# Altium PCB PCB1.PcbDoc
Units mil, origin at the board's own origin, x right, y up, seen from the top; angles counter-clockwise.
Board outline 3330 x 3590 mil, 2 copper layers (Top Layer, Bottom Layer); 11 components, 12 nets, 35 pads, 4 vias.
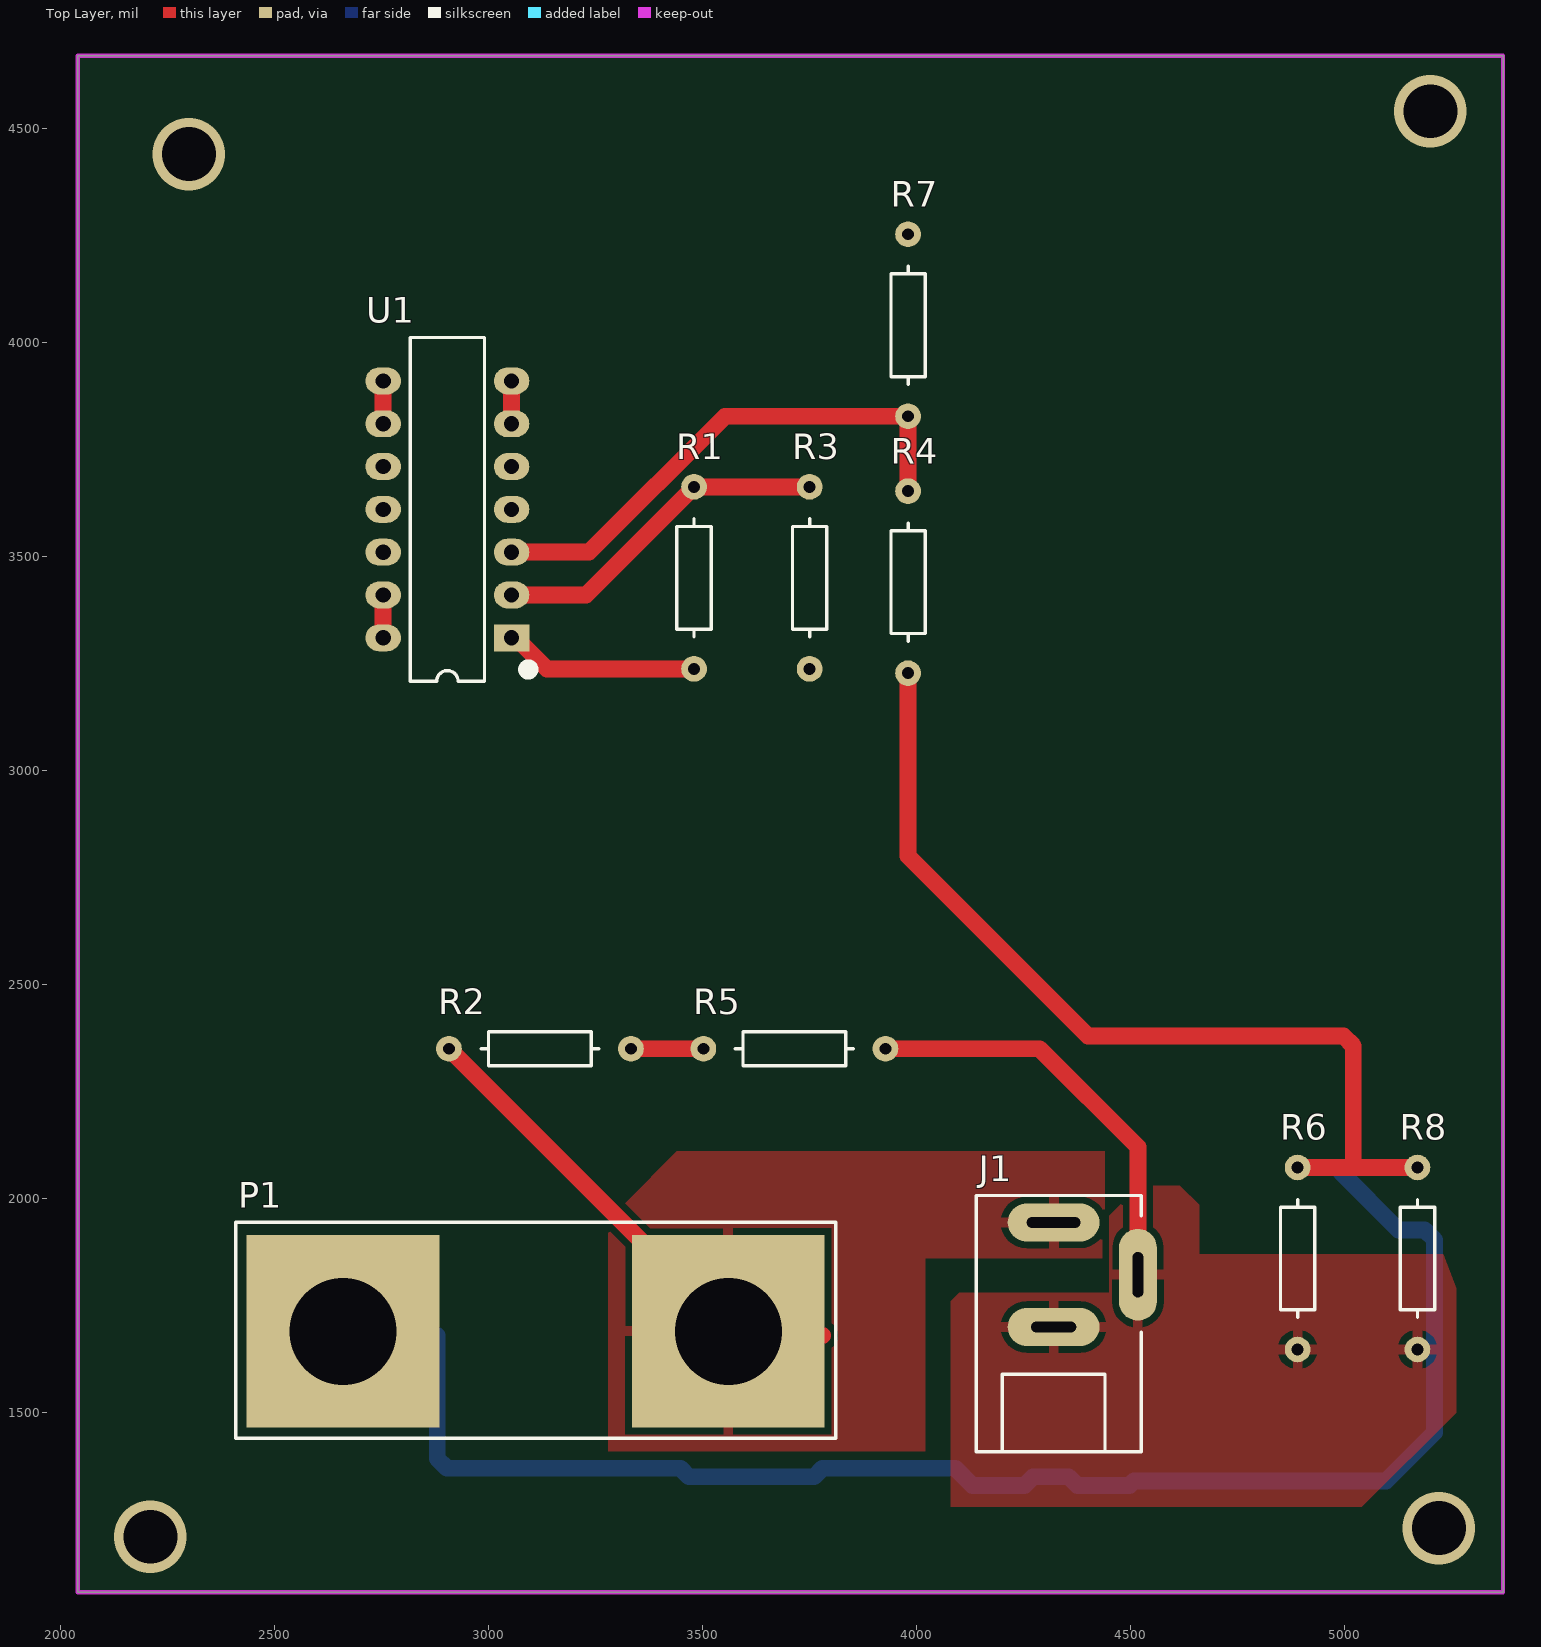
[diagram p0: Top Layer view]
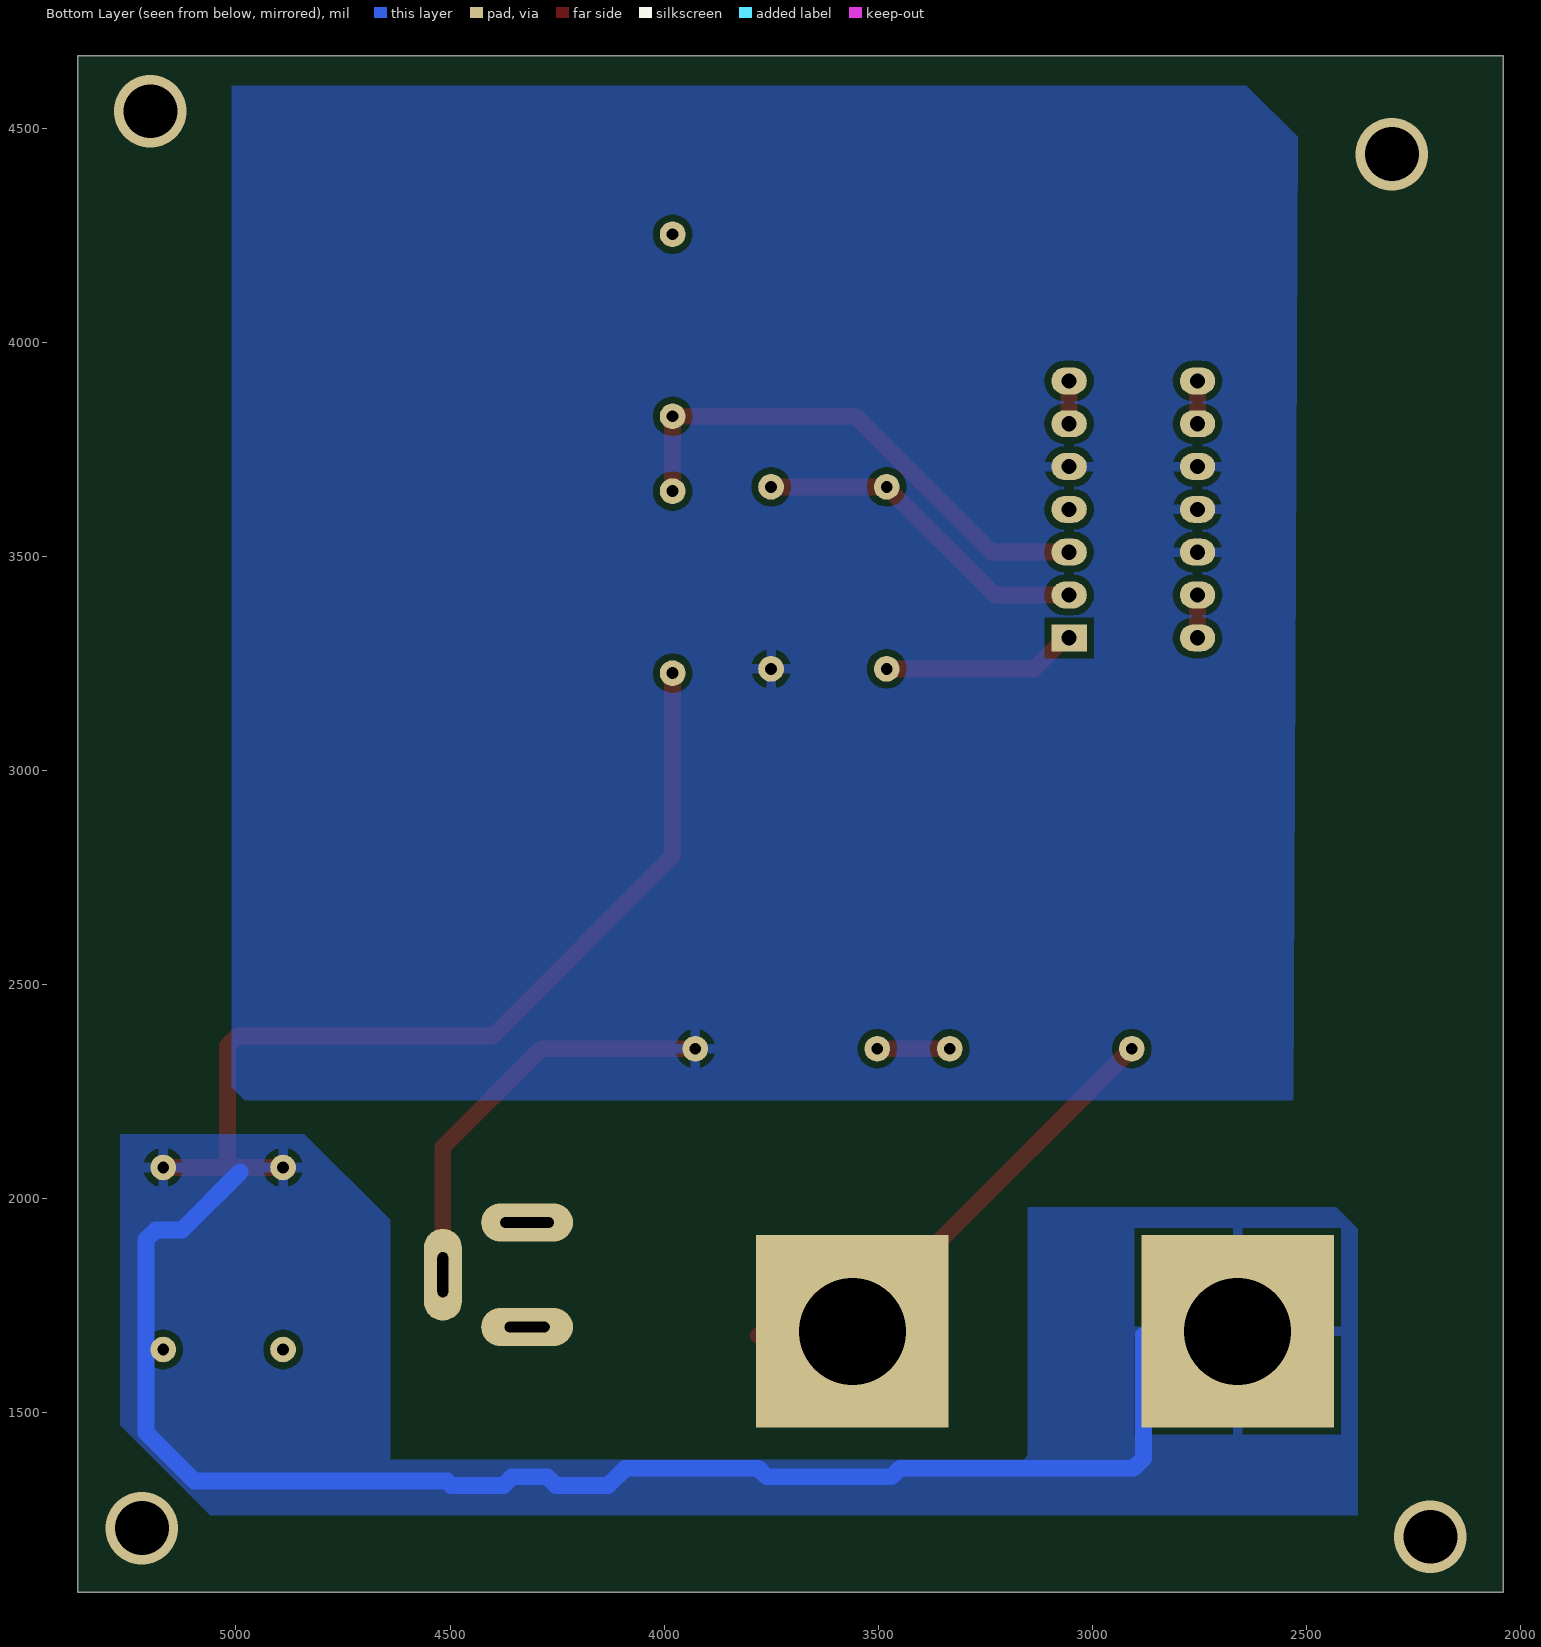
[diagram p1: Bottom Layer view, seen from below]
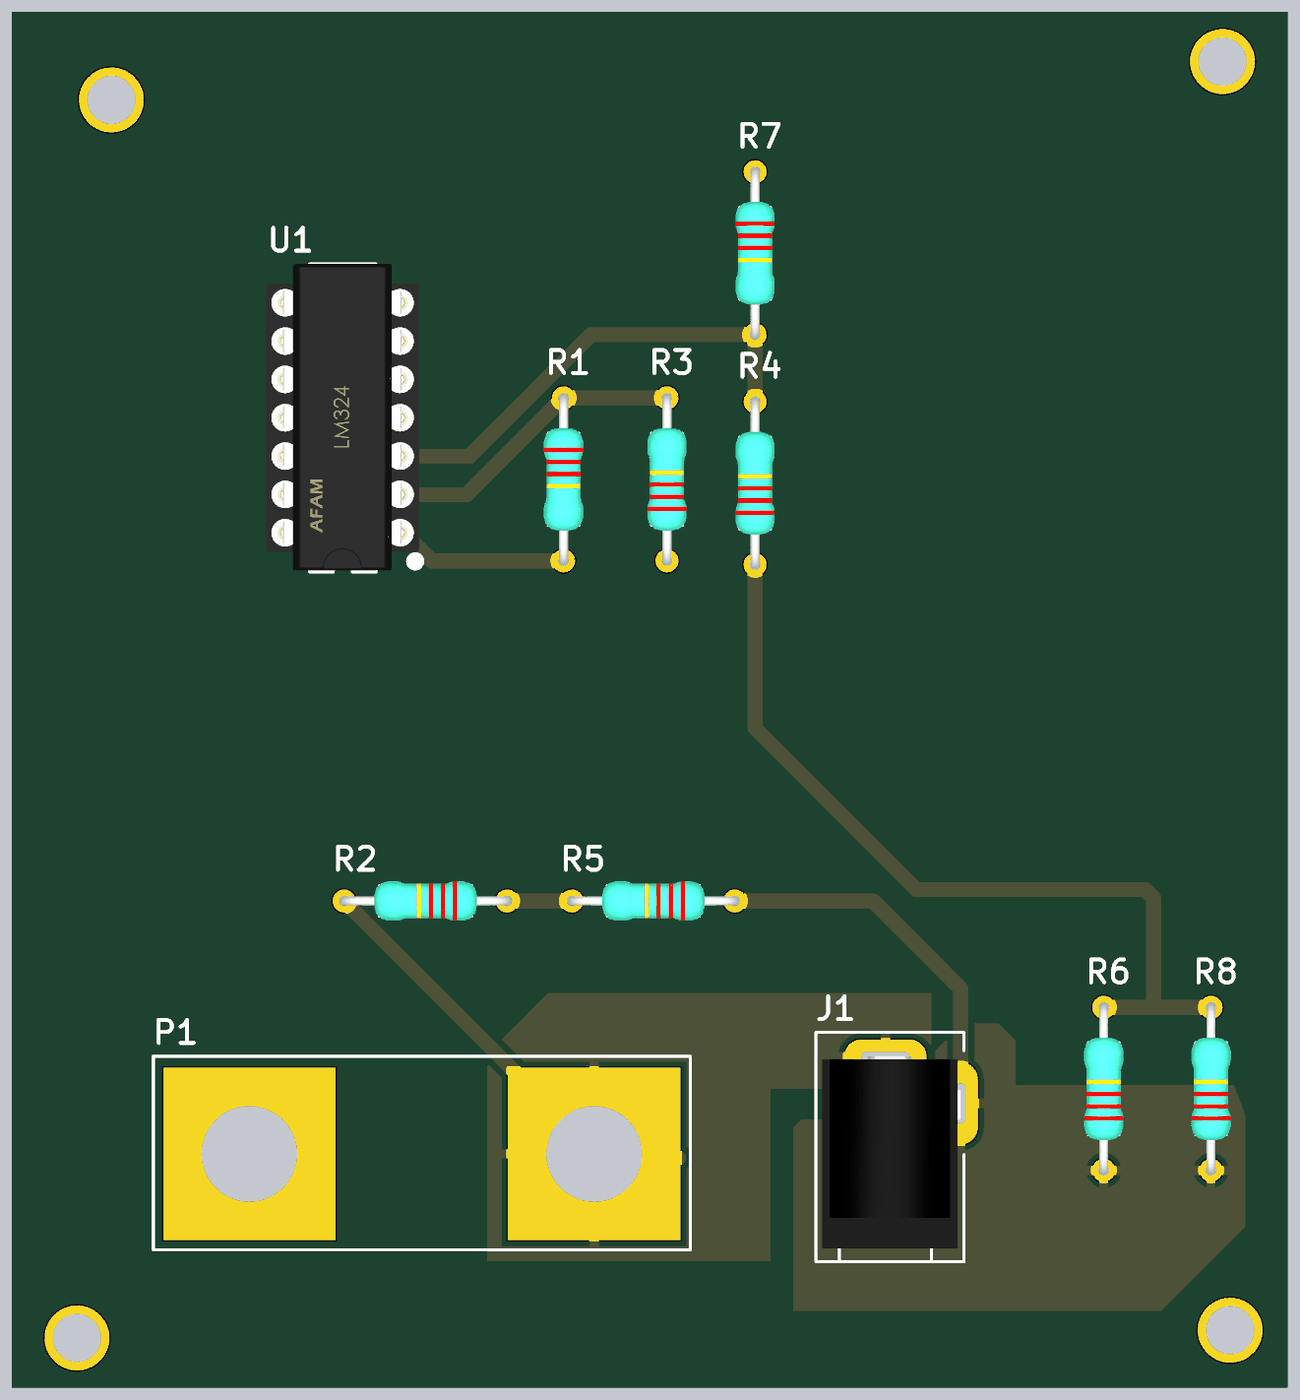
[diagram p2: 3D render of the assembled board from above, using the file's embedded part models]

## Layer stack, top to bottom
Top Solder: solder mask 0.4, Solder Resist, Dk 3.5
Top Layer: signal copper 1.4
Dielectric 1: dielectric 12.6, FR-4, Dk 4.8
Bottom Layer: signal copper 1.4
Bottom Solder: solder mask 0.4, Solder Resist, Dk 3.5

## Board outline
2040,1080 5370,1080 5370,4670 2040,4670

## Design rules (kind name [scope] priority, off if disabled: settings)
Clearance [All] p1: gap=15.75 ignorepadtopadclearanceinfootprint=FALSE
Height [All] p1: minheight=0 maxheight=787.4 prefheight=500
HoleSize [All] p1: absolutevalues=TRUE maxlimit=393.7 minlimit=15.75 maxpercent=80.000 minpercent=20.000
PolygonConnect [All] p1: connectstyle=Relief reliefconductorwidth=23.62 reliefentries=4 polygonreliefangle="90 Angle" airgapwidth=15.75
RoutingVias [All] p1: holewidth=28 width=50 viastyle="Through Hole" minholewidth=28 minwidth=50 maxholewidth=28 maxwidth=50
SilkToSilkClearance [All] p1: silktosilkclearance=3.94
SilkToSolderMaskClearance [IsPad] p1: minsilkscreentomaskgap=3.94 clearancetoexposedcopper=TRUE
SolderMaskExpansion [All] p1: expansion=4 istentingtop=FALSE
Width [All] p1: maxlimit=393.7 minlimit=15.75 preferedwidth=23.62
26 further rules are at their usual default settings.

## Components (designator, comment, footprint, x,y, rotation, side; value= is the part's Value field where it differs from the comment)
J1 "DC barrel jack" AC-Socket 4320,1707.87 r90 top value=socket
P1 "Dual Banana Plugs" "Dual Banana Plug" 3110,1690 r180 top
R1 "10k" AXIAL-0.4 3480,3450 r270 top value=100k
R2 "10k" AXIAL-0.4 3120,2350 r180 top value=100k
R3 "10k" AXIAL-0.4 3750,3450 r90 top
R4 "10k" AXIAL-0.4 3980,3440 r90 top
R5 "1k" AXIAL-0.4 3714.48,2350 r180 top value=1k2
R6 "1R" AXIAL-0.4 4890,1860 r90 top value=1
R7 "10k" AXIAL-0.4 3980,4040 r270 top
R8 "1R" AXIAL-0.4 5170,1860 r90 top
U1 "LM324" DIP-14 2903.8,3610 r180 top

## Footprints (in the part's own frame and the unit in brackets; to place one, negate y for a bottom-side part, rotate by r counter-clockwise, add the part's x,y. Pads: shape width x height; smd on the part's side, far side on the other; paste and mask are expansions set on the pad)
AC-Socket [mm]
  oval 2.25x5.45 hole 0.635 slot 3.175 at 90 deg: 1(6,0)
  oval 5.45x2.25 hole 0.635 slot 2.667 at 0 deg: 2(2.9,-5)
  oval 2.25x5.45 hole 0.635 slot 2.667 at 90 deg: 3(-0.2,0)
  silkscreen extent -7.6,-5.2 7.6,4.6, body extent -6.7,-5 6,4.2, height 10.5
AXIAL-0.4 [mil]
  round 60 hole 27.56: 1(-212.6,0) 2(212.6,0)
  silkscreen extent -138,-40 138,40, body extent -224,-51 224,51, height 106
DIP-14 [mm] "DIP; 14 Leads; Row Spacing 7.62 mm; Pitch 2.54 mm"
  rect 2.1x1.6 hole 0.9: 1(-3.81,7.62)
  oval 2.1x1.6 hole 0.9: 2(-3.81,5.08) 3(-3.81,2.54) 4(-3.81,0) 5(-3.81,-2.54) 6(-3.81,-5.08) 7(-3.81,-7.62) 8(3.81,-7.62) 9(3.81,-5.08) 10(3.81,-2.54) 11(3.81,0) 12(3.81,2.54) 13(3.81,5.08) 14(3.81,7.62)
  silkscreen extent -5.1,-10.2 2.2,10.2, body extent -5.07,-10.2 5.09,10.12, height 9.47
"Dual Banana Plug" [mil] "Connector; 2 Position"
  rect 450x450 hole 250: 1(-450,0) 2(450,0)
  silkscreen extent -701,-255 701,250, body extent -684,-236 686,236, height 217

## Part data
J1: library part AC_Input, "DC barrel jack connection to AC source"
P1: library part AC_Output, "Dual banana plugs connection to the AC load", LatestRevisionDate=17-Jul-2002, LatestRevisionNote="Re-released for DXP Platform.", Publisher="Altium Limited"
R1 R2 R3 R4 R5 R6 R7 R8: library part Res_TH_0AX4, "Through hole resistor", ComponentLink1Description=http://www.royalohm.com/pdf/product2017/PrecisionMetalMF.pdf, LatestRevisionDate=17-Jul-2002, LatestRevisionNote="Re-released for DXP Platform.", PackageReference=AXIAL-0.4, Published=8-Jun-2000, Publisher="Altium Limited"
U1: library part LM324N_TH_DIP16, "IC OPAMP GP 14DIP", Current - Supply=1mA, Manufacturer="ON Semiconductor", Manufacturer Part Number=LM324N, Operating Temperature="0°C ~ 70°C", Package / Case="14-DIP (0.300\", 7.62mm)", Supplier Device Package=14-DIP, Supplier Part Number 1=LM324NFS-ND, Voltage - Supply, Single/Dual (±)="3 V ~ 32 V, ±1.5 V ~ 16 V", Amplifier Type="General Purpose", Base Part Number=LM324, Category="Integrated Circuits (ICs)", ComponentLink1Description=https://www.fairchildsemi.com/datasheets/LM/LM2902.pdf, ComponentLink1URL=https://www.fairchildsemi.com/datasheets/LM/LM2902.pdf, Mounting Type="Through Hole", Output Type=-, Packaging=Tube, Part Status=Active, Pricing 1="1=0.9, 10=0.775, 100=0.5789, 500=0.45482, 1000=0.35145 (NZD)", RoHS="RoHS Compliant", Slew Rate=-, Stock 1=2900, Supplier 1=Digi-Key

## Via types
v1: diameter 169.29, hole 125.98, Top Layer to Bottom Layer, 4 vias

## Nets (pads, with @x,y where several pads share a name; then routed paths per layer and width w, separated by ;. In a path a pad name is that pad's centre, name@x,y a point inside that pad or via, vN(x,y) a via of type N, cw(c..) or ccw(c..) an arc to the next point about the centre after c; other vN are vias at no path point)
2.1V: R7.1
5V: U1.4
GND: J1.2 J1.3 R3.1 R5.1 R6.1 R8.1 U1.5 U1.10 U1.11 U1.12 | length 983
  Top Layer w39.37: R5.1 4286.94,2350 4516.85,2120.09 J1.2
NetR1_1: R1.1 R3.2 U1.2 | length 800.8
  Top Layer w39.37: U1.2 3227.4,3410 R1.1 R3.2
NetR1_2: R1.2 U1.1 | length 456.3
  Top Layer w39.37: U1.1 3063.64,3310 3136.24,3237.4 R1.2
NetR4_2: R4.2 R7.2 U1.3 | length 1232.5
  Top Layer w39.37: U1.3 3234.87,3510 3552.26,3827.4 R7.2 R4.2
NetU1_6: U1.6 U1.7 | length 100
  Top Layer w39.37: U1.6 U1.7
NetU1_8: U1.8 U1.9 | length 100
  Top Layer w39.37: U1.9 U1.8
NetU1_13: U1.13 U1.14 | length 100
  Top Layer w39.37: U1.14 U1.13
Vac: J1.1 P1.1 R2.2 | length 1265.8
  Top Layer w39.37: R2.2 3380,1877.4 3380,1680 P1.1@3780,1680
Vis: P1.2 R4.1 R6.2 R8.2 | length 5682.1
  Top Layer w39.37: R4.1 3980,2800 4400,2380 4996.94,2380 5020,2356.94 5020,2080 5012.6,2072.6 ; R6.2 5012.6,2072.6 ; R8.2 5012.6,2072.6
  Bottom Layer w39.37: P1.2@2880,1680 2880,1393.06 2903.06,1370 3448.39,1370 3468.39,1350 3760,1350 3780,1370 4090.59,1370 4130.59,1330 4252.21,1330 4272.21,1350 4355.45,1350 4375.45,1330 4497.08,1330 4507.08,1340 5096.94,1340 5210,1453.06 5210,1903.88 5186.94,1926.94 5125.66,1926.94 4990,2062.6
Vvs: R2.1 R5.2 | length 169.3
  Top Layer w39.37: R2.1 R5.2
copper on no net:
  other v1: 2210,1210 5220,1230 2300,4440 5200,4540

## Polygon pours and split planes (outlines as drawn)
Vis on Bottom Layer "VIS_L02_P000" (solid, pour order 0): 2380,1930 2430,1980 3150,1980 3150,1400 3160,1390 4640,1390 4640,1950 4840,2150 5270,2150 5270,1470 5060,1260 2380,1260
GND on Bottom Layer "GND_L02_P003" (solid, pour order 3): 2530,2230 4980,2230 5010,2260 5010,4600 2640,4600 2520,4480
Vac on Top Layer "VAC_L01_P002" (solid, pour order 2): 4440,2110 4440,1860 4020,1860 4020,1410 3280,1410 3280,1950 3440,2110
GND on Top Layer "GND_L01_P001" (solid, pour order 1): 4615,2030 4660,1985 4660,1870 5230,1870 5260,1790 5260,1500 5040,1280 4080,1280 4080,1760 4100,1780 4450,1780 4450,1960 4520,2030

## Keep-outs
Top Layer:
  the board outline again, w10